# Altium PCB HVPS.PcbDoc (part 2 of 2)
Units mm, origin at the board's own origin, x right, y up, seen from the top; angles counter-clockwise.
Board outline 99 x 77 mm, 4 copper layers (L1, L2, L3, L4), stack 0.603 mm thick; 95 components, 67 nets, 310 pads, 327 vias.
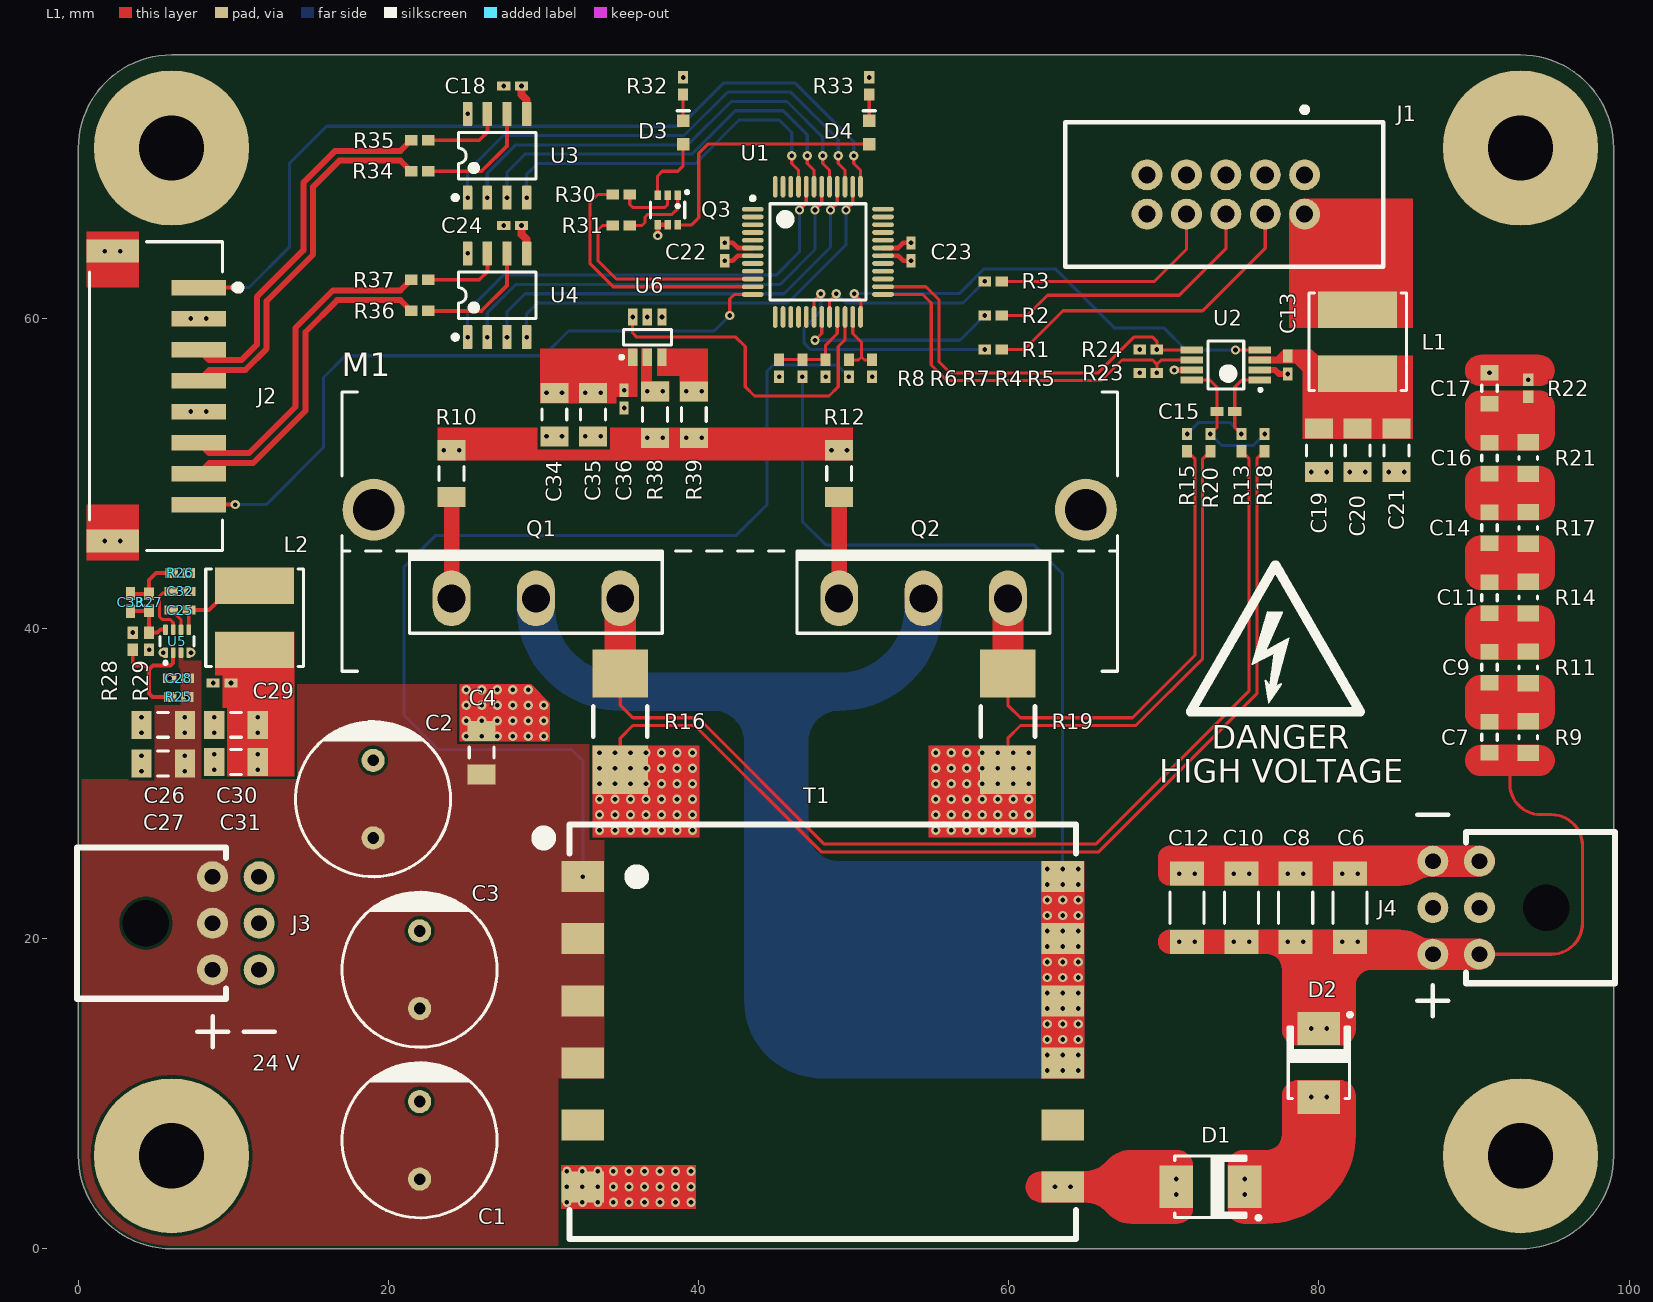
[diagram p0: L1 view]

## Other copper (continued)
L3: (continued)
  region net HVOUT: 77.628,14.13 77.628,18.025 ccw(c76.628,18.025) 76.628,19.025 70.4,19.025 cw(c70.4,19.8) 70.4,20.575 85.284,20.575 cw(c85.284,18.575) 86.317,20.287 ccw(c87.35,22) 87.35,20 90.35,20 cw(c90.35,19) 90.35,18 83.372,18 ccw(c83.372,17) 82.372,17 82.372,14.13 cw(c81.372,14.13) 81.372,13.13 78.628,13.13 cw(c78.628,14.13)
  region net DRAIN: 62.1,11 62.1,25 64.85,25 64.85,11
L4:
  region net DRAIN: 34.94,34.715 40.94,34.715 cw(c40.94,32.715) 42.94,32.715 42.94,16 ccw(c47.94,16) 47.94,11 64.85,11 64.85,25 49.06,25 cw(c49.06,27) 47.06,27 47.06,32.715 cw(c49.06,32.715) 49.06,34.715 ccw(c49.06,41.375) 55.72,41.375 55.72,41.955 53.28,41.955 53.28,41.375 cw(c49.06,41.375) 49.06,37.155 34.94,37.155 cw(c34.94,41.375) 30.72,41.375 30.72,41.955 28.28,41.955 28.28,41.375 ccw(c34.94,41.375)
  region net NetD1_2: 62.1,3 cw(c62.1,4) 62.1,5 64.85,5 ccw(c64.85,7) 66.358,5.686 cw(c67.865,4.371) 67.865,6.372 70.87,6.372 cw(c70.87,5.372) 71.87,5.372 71.87,2.628 cw(c70.869,2.628) 70.869,1.628 67.865,1.628 cw(c67.865,3.628) 66.358,2.314 ccw(c64.85,1) 64.85,3
  region net NetD1_1: 74.13,2.628 ccw(c75.13,2.628) 75.13,1.628 76.628,1.628 ccw(c76.628,7.372) 82.372,7.372 82.372,9.869 ccw(c81.372,9.869) 81.372,10.869 78.628,10.869 ccw(c78.628,9.869) 77.628,9.869 77.628,7.372 cw(c76.628,7.372) 76.628,6.372 75.13,6.372 ccw(c75.13,5.372) 74.13,5.372
  region net HVOUT: 77.628,14.13 77.628,18.025 ccw(c76.628,18.025) 76.628,19.025 70.4,19.025 cw(c70.4,19.8) 70.4,20.575 85.284,20.575 cw(c85.284,18.575) 86.317,20.287 ccw(c87.35,22) 87.35,20 90.35,20 cw(c90.35,19) 90.35,18 83.372,18 ccw(c83.372,17) 82.372,17 82.372,14.13 cw(c81.372,14.13) 81.372,13.13 78.628,13.13 cw(c78.628,14.13)
  region net COM: 69.625,24.2 ccw(c70.4,24.2) 70.4,23.425 85.284,23.425 ccw(c85.284,25.425) 86.317,23.713 cw(c87.35,22) 87.35,24 90.35,24 ccw(c90.35,25) 90.35,26 70.4,26 ccw(c70.4,25.225) 69.625,25.225
  region net COM: 24.6,32.75 30.4,32.75 30.4,35.2 29.2,36.4 24.6,36.4
  region net COM: 31.15,2.6 39.8,2.6 39.8,5.4 31.15,5.4
  region net COM: 40.045,26.555 33.155,26.555 33.155,32.445 40.045,32.445
  region net COM: 61.725,26.555 54.835,26.555 54.835,32.445 61.725,32.445

## Silkscreen, mask and mechanical layers (free items; w line width, h text height)
Top Overlay:
  drawing of 8 lines, arcs and shapes, not listed
  text "DANGER" at 73.083,32.25 h1.5
  text "HIGH VOLTAGE" at 69.702,30.05 h1.5
  text "24 V" at 11.2,11.5 h1
Bottom Overlay:
  text "HIGH VOLTAGE" at 97,43.824 h4
  text "PRE-REGULATOR" at 97,40.824 h4
  text "Judd Foster | Rev A | Jan 2025" at 96.8,39 h1
Bottom Solder:
  region: 42.94,16 42.94,32.715 ccw(c40.94,32.715) 40.94,34.715 34.94,34.715 cw(c34.94,41.375) 28.28,41.375 28.28,41.955 30.72,41.955 30.72,41.375 ccw(c34.94,41.375) 34.94,37.155 49.06,37.155 ccw(c49.06,41.375) 53.28,41.375 53.28,41.955 55.72,41.955 55.72,41.375 cw(c49.06,41.375) 49.06,34.715 ccw(c49.06,32.715) 47.06,32.715 47.06,27 ccw(c49.06,27) 49.06,25 61.1,25 cw(c61.1,24) 61.1,23 49,23 ccw(c49,22) 49,21 61.1,21 cw(c61.1,20) 61.1,19 49,19 ccw(c49,18) 49,17 61.1,17 cw(c61.1,16) 61.1,15 49,15 ccw(c49,14) 49,13 61.1,13 cw(c61.1,12) 61.1,11 47.94,11 cw(c47.94,16)
Mechanical 1:
  the board outline again, w0.2
OL1:
  drawing of 193 lines, arcs and shapes, not listed
OL2:
  lines w0.05: 0,0 39.8,0 39.8,25.2 65.05,25.2 65.05,23.425 85.284,23.425 ccw(c85.284,25.425) 86.317,23.713 cw(c87.35,22) 87.35,24 90.35,24 ccw(c90.35,25) 90.35,26 86.35,26 86.35,49.45 86.625,49.45 ccw(c86.625,51.95) 89.125,51.95 89.125,54.35 cw(c90.425,54.35) 90.425,55.65 99,55.65 99,77 0,77 0,0
OL3:
  lines w0.05: 0,0 0,30.296 14.109,30.296 14.109,53.226 20.083,59.2 86.25,59.2 86.25,77 99,77 99,55.65 90.425,55.65 ccw(c90.425,54.35) 89.125,54.35 89.125,51.95 cw(c86.625,51.95) 86.625,49.45 86.35,49.45 86.35,26 90.35,26 cw(c90.35,25) 90.35,24 87.35,24 ccw(c87.35,22) 86.317,23.713 cw(c85.284,25.425) 85.284,23.425 65.05,23.425 65.05,25.2 39.8,25.2 39.8,0 0,0 ; 0,30.496 13.909,30.496 13.909,53.309 20,59.4 86.05,59.4 86.05,77 0,77 0,30.496
OL4:
  lines w0.05: 28.28,41.375 ccw(c34.94,41.375) 34.94,34.715 40.94,34.715 cw(c40.94,32.715) 42.94,32.715 42.94,16 ccw(c47.94,16) 47.94,11 64.85,11 64.85,25 49.06,25 cw(c49.06,27) 47.06,27 47.06,32.715 cw(c49.06,32.715) 49.06,34.715 ccw(c49.06,41.375) 55.72,41.375 55.72,41.955 53.28,41.955 53.28,41.375 cw(c49.06,41.375) 49.06,37.155 34.94,37.155 cw(c34.94,41.375) 30.72,41.375 30.72,41.955 28.28,41.955 28.28,41.375
OLM:
  lines w0.05: 28.28,41.375 ccw(c34.94,41.375) 34.94,34.715 40.94,34.715 cw(c40.94,32.715) 42.94,32.715 42.94,16 ccw(c47.94,16) 47.94,11 61.1,11 ccw(c61.1,12) 61.1,13 49,13 cw(c49,14) 49,15 61.1,15 ccw(c61.1,16) 61.1,17 49,17 cw(c49,18) 49,19 61.1,19 ccw(c61.1,20) 61.1,21 49,21 cw(c49,22) 49,23 61.1,23 ccw(c61.1,24) 61.1,25 49.06,25 cw(c49.06,27) 47.06,27 47.06,32.715 cw(c49.06,32.715) 49.06,34.715 ccw(c49.06,41.375) 55.72,41.375 55.72,41.955 53.28,41.955 53.28,41.375 cw(c49.06,41.375) 49.06,37.155 34.94,37.155 cw(c34.94,41.375) 30.72,41.375 30.72,41.955 28.28,41.955 28.28,41.375

## Text inside footprints (layer, text, board x,y; h text height)
M1: Mechanical 15 "Thermal Interface" at 39.121,45.55 h0.5
Q1: Mechanical 15 "Thermal Interface" at 26.621,43.95 h0.5
Q2: Mechanical 15 "Thermal Interface" at 51.621,43.95 h0.5